# Altium PCB SoilMonitor.PcbDoc
Units mil, origin at the board's own origin, x right, y up, seen from the top; angles counter-clockwise.
Board outline 3736.79 x 2791.9 mil, 4 copper layers (Top Layer, GND, 3V3, Bottom Layer), stack 65.956 mil thick; 38 components, 26 nets, 150 pads, 50 vias.
Unrouted connection lines stored in the file: 2.
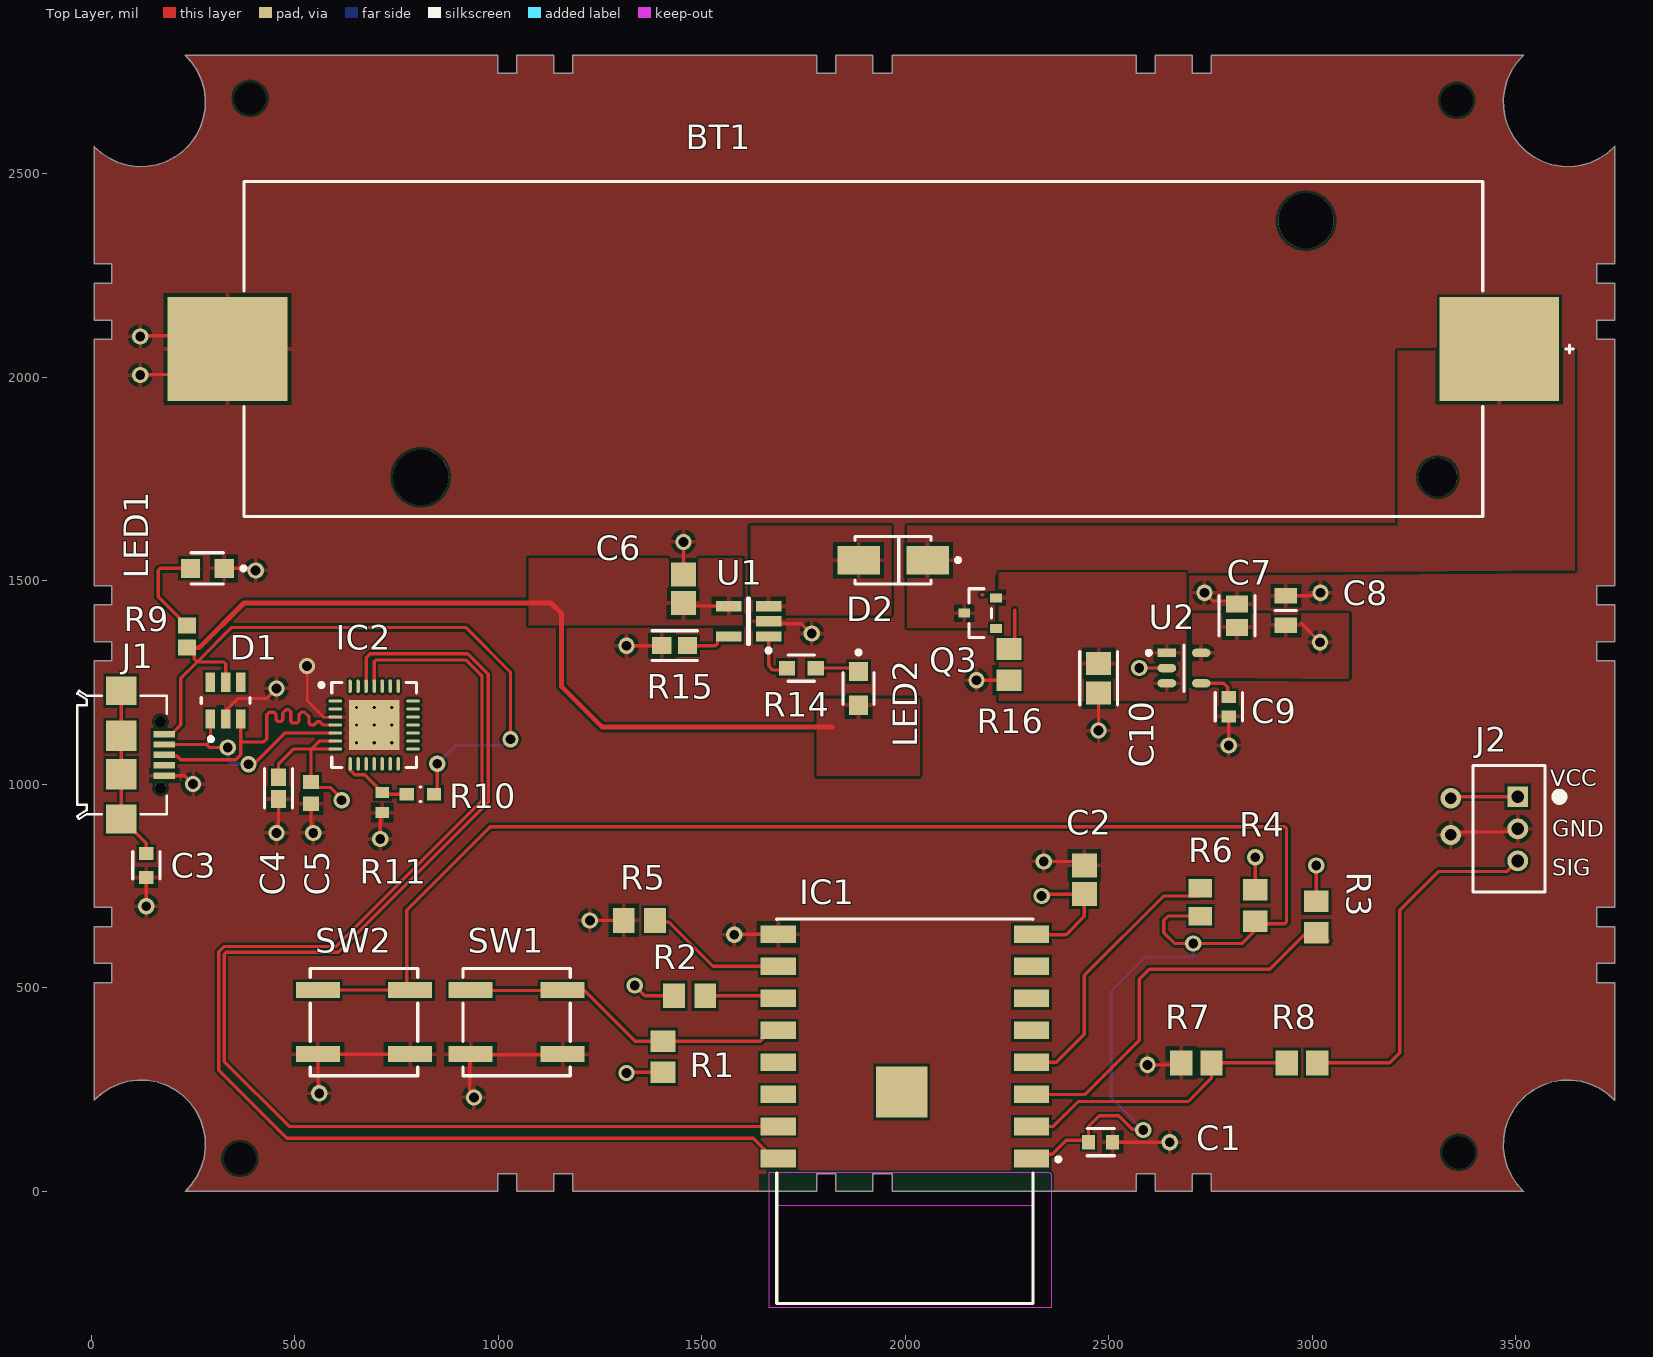
[diagram p0: Top Layer view]
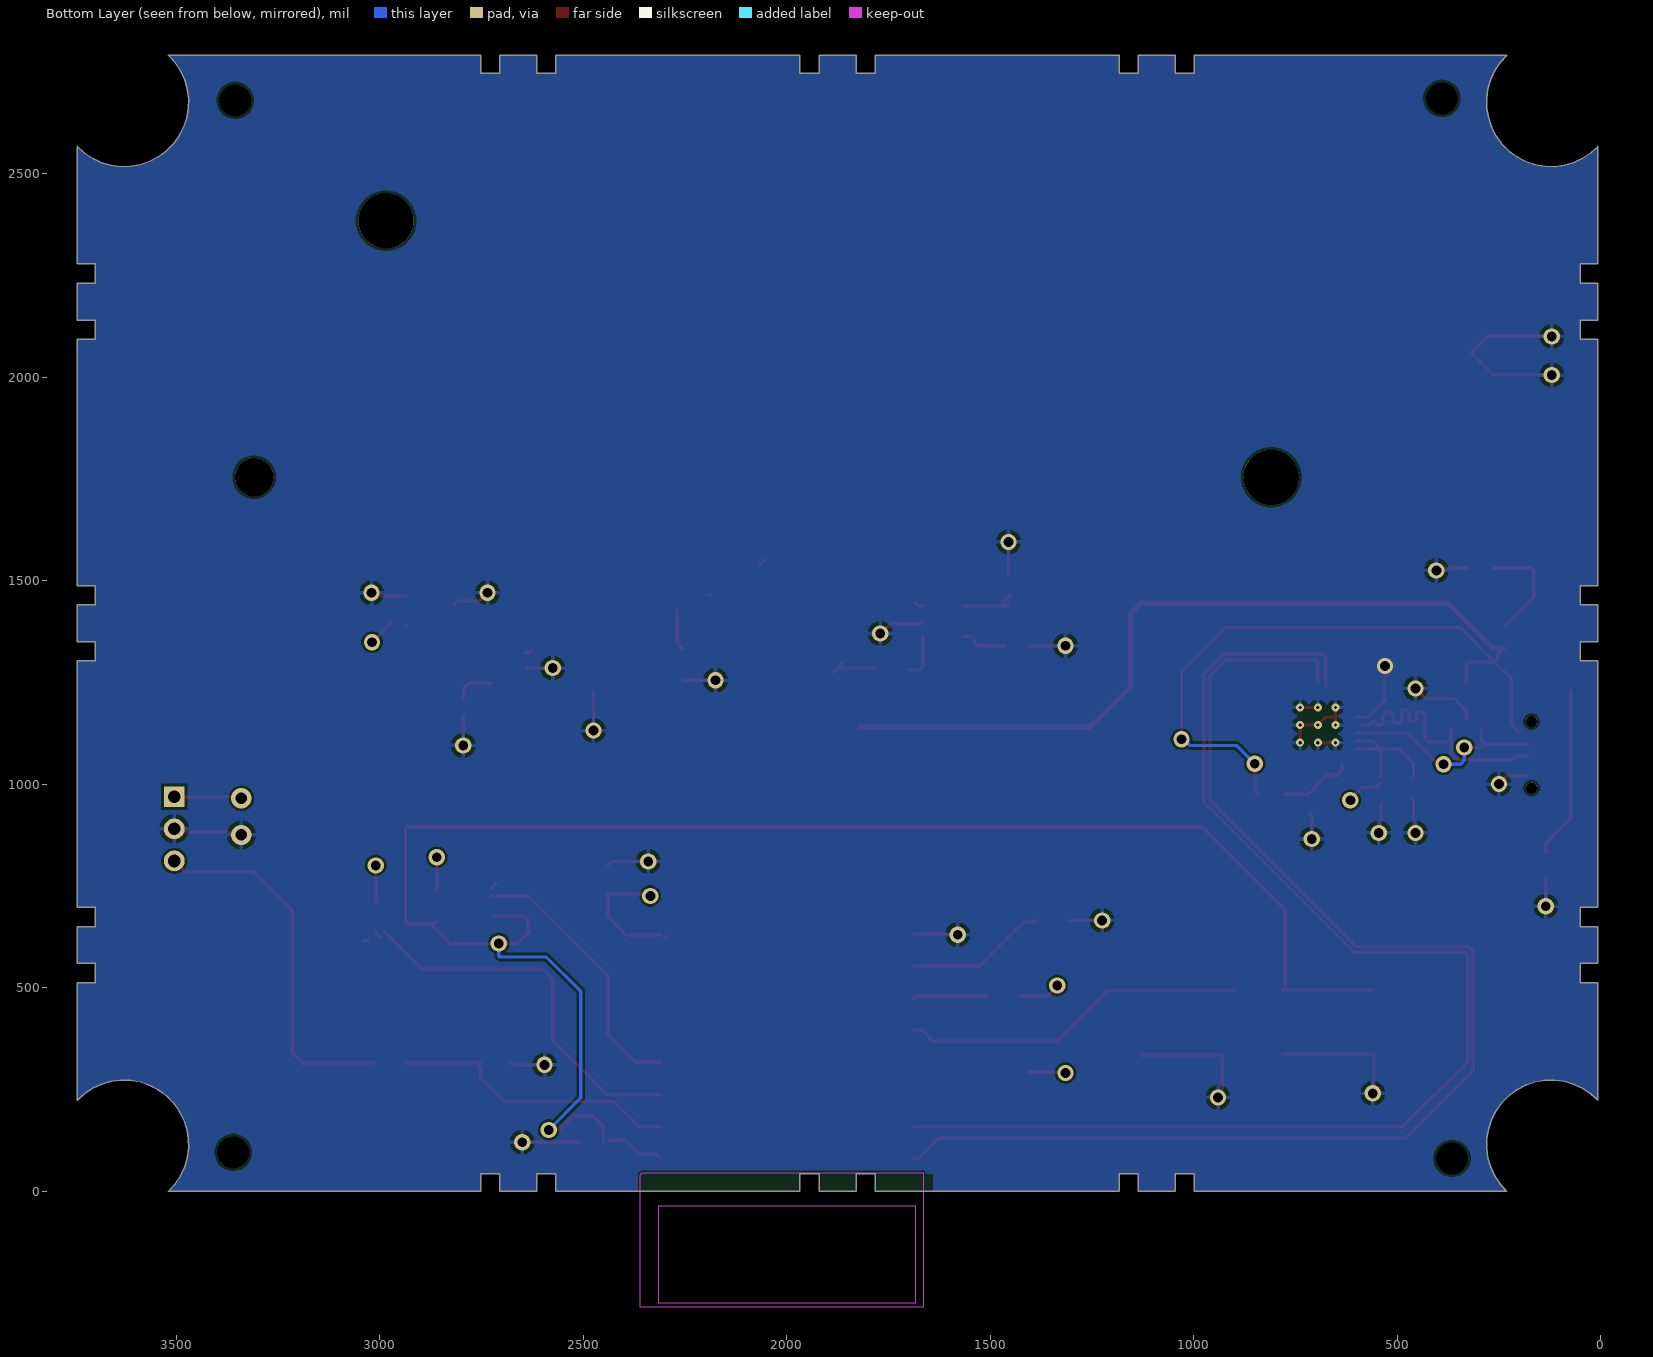
[diagram p1: Bottom Layer view, seen from below]
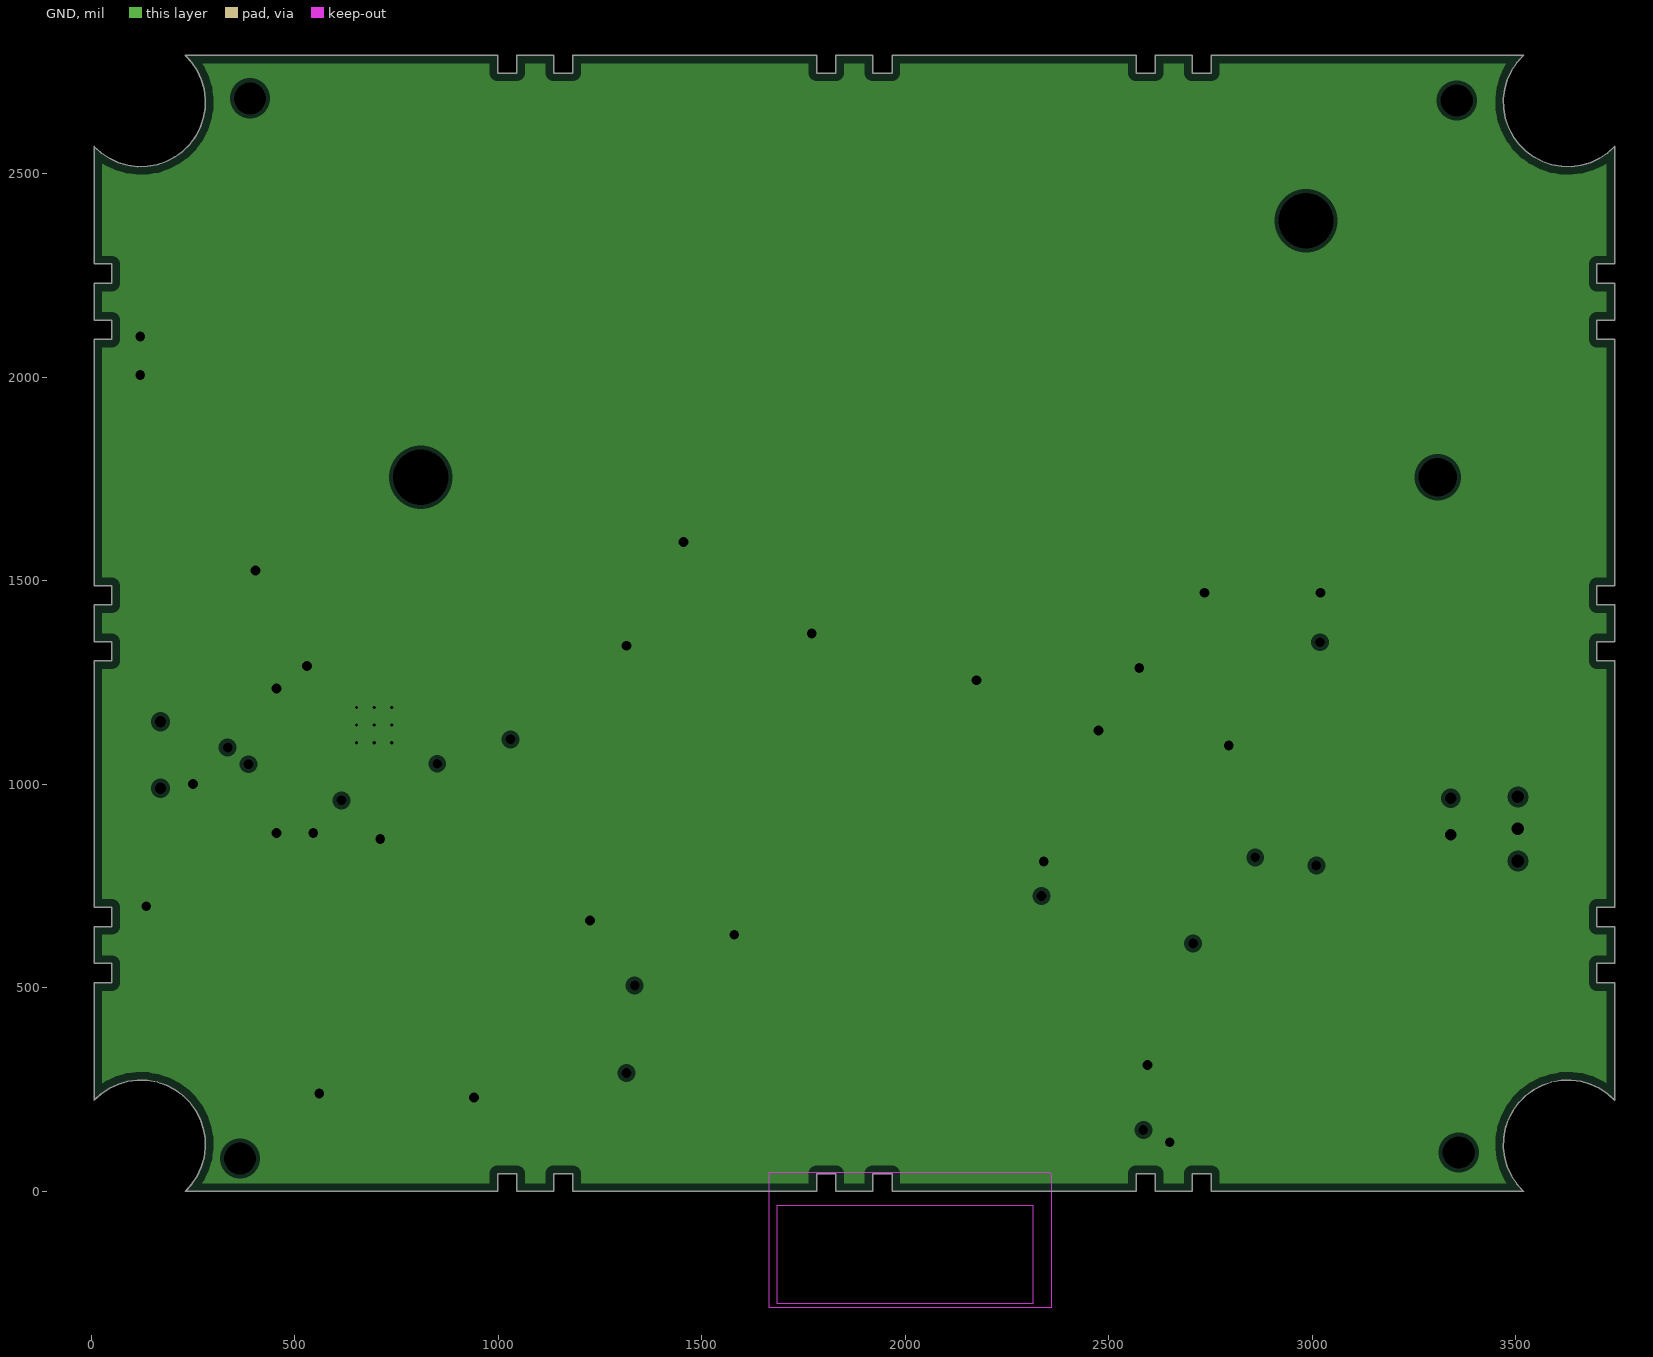
[diagram p2: GND, clearances drawn from the general rule]
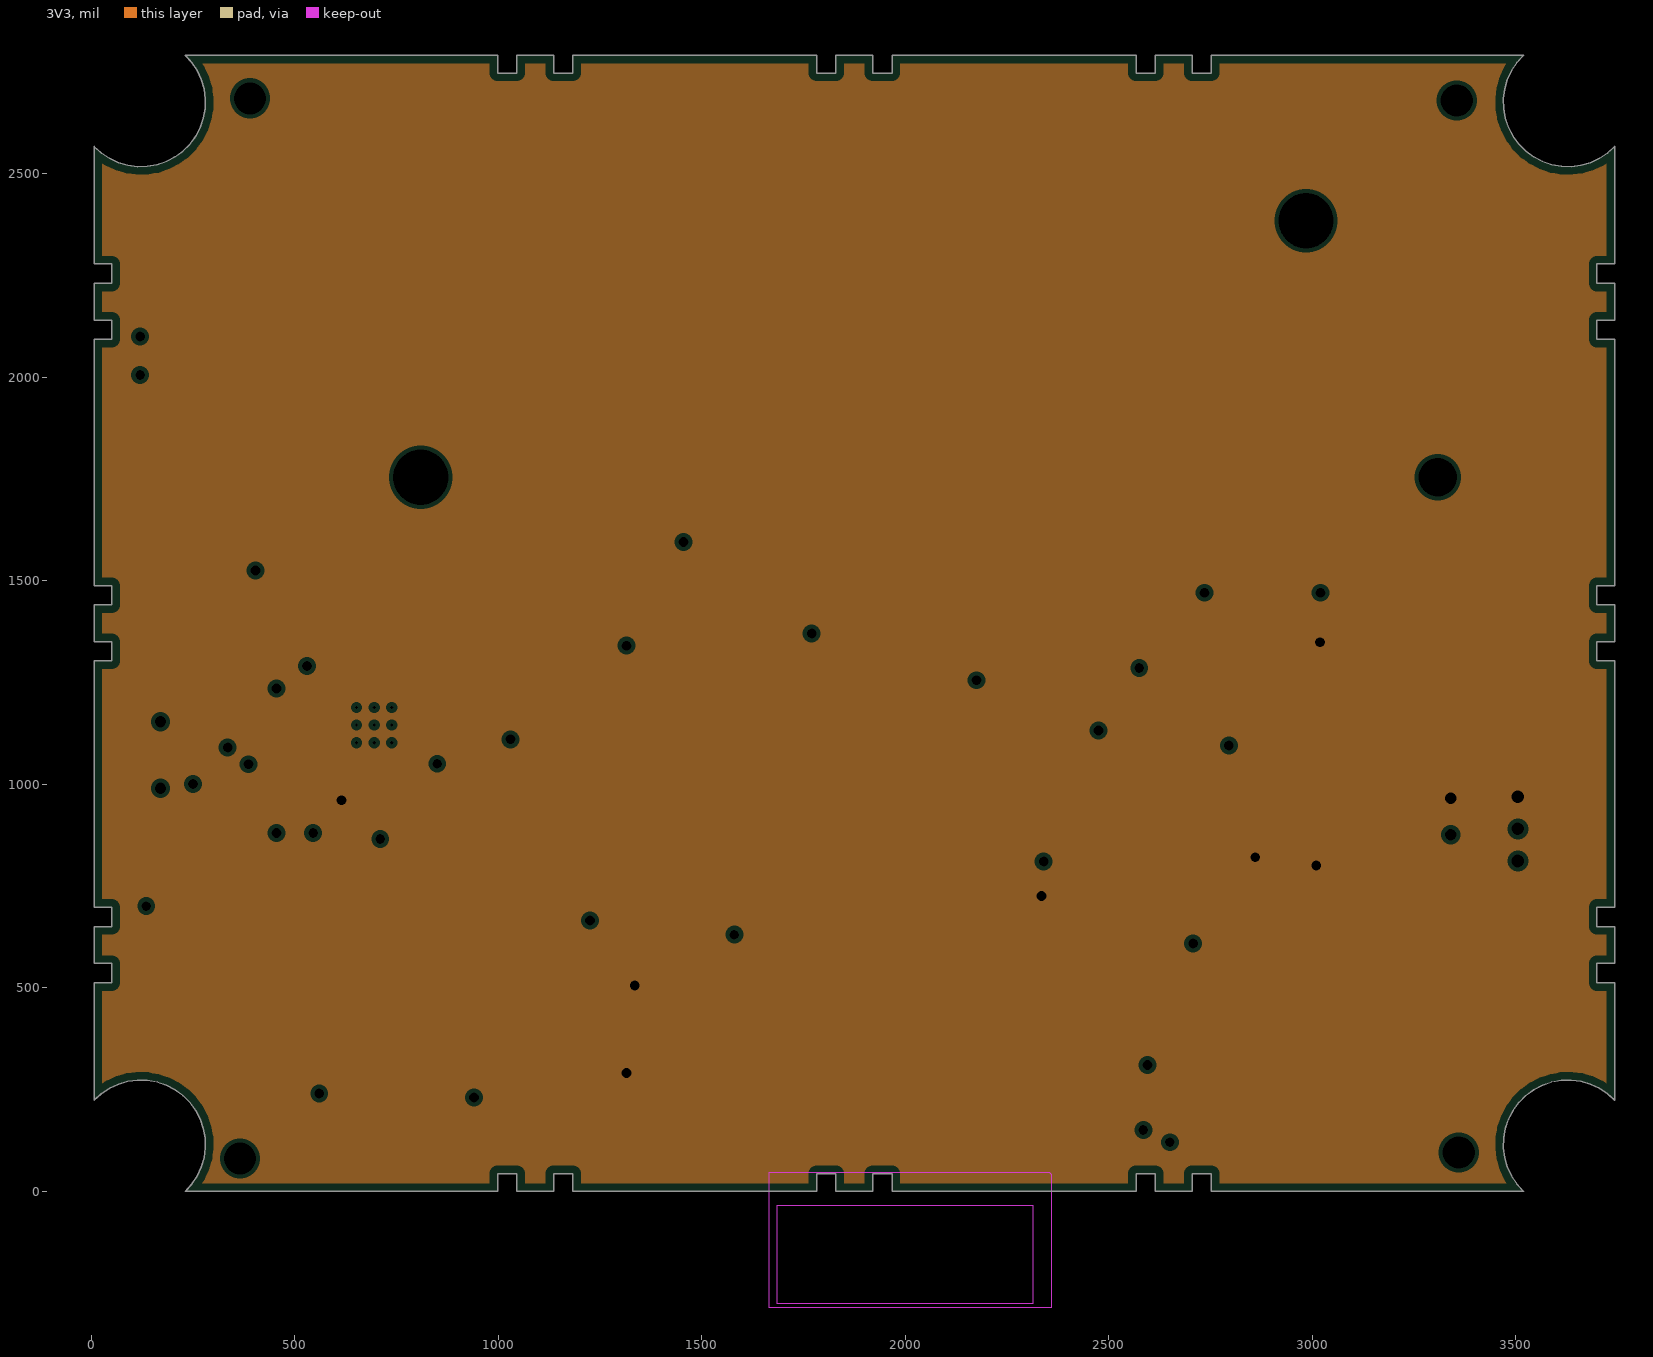
[diagram p3: 3V3, clearances drawn from the general rule]
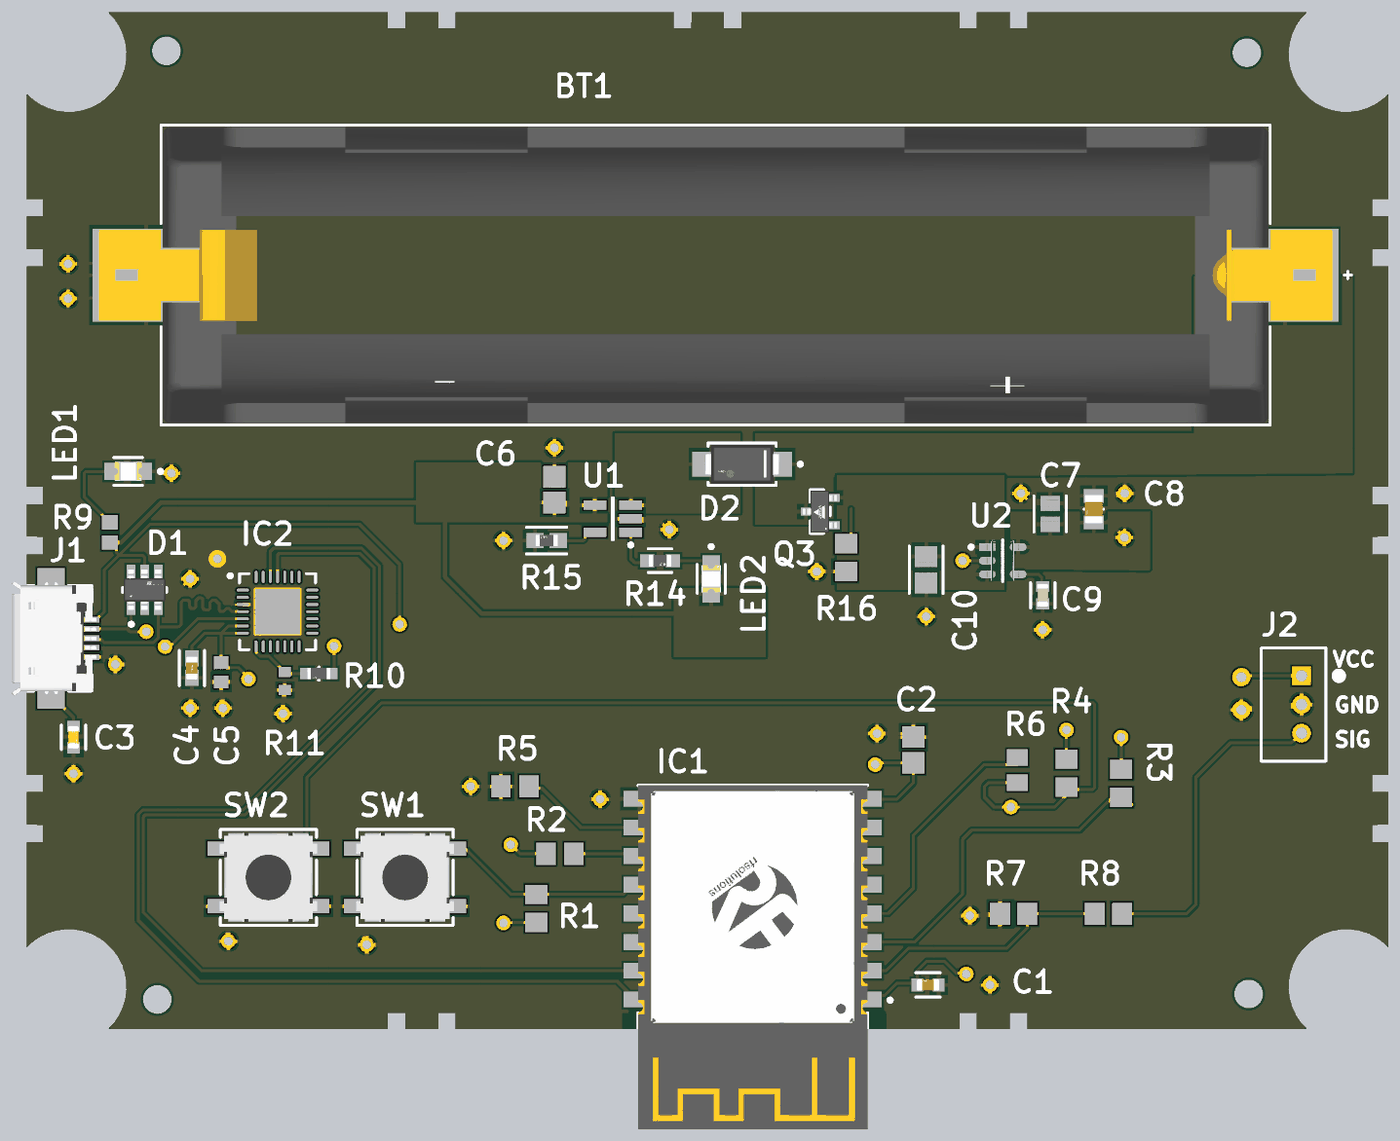
[diagram p4: 3D render of the assembled board from above, using the file's embedded part models]

## Layer stack, top to bottom
Top Solder: solder mask 0.4, Solder Resist, Dk 3.5
Top Layer: signal copper 1.4
Dielectric 2: prepreg 10.2, PP-006, Dk 4.1
GND: plane copper 1.378, net GND
Dielectric 1: core 40, FR-4, Dk 4.8
3V3: plane copper 1.378, net 3V3
Dielectric 3: prepreg 10.2, PP-006, Dk 4.1
Bottom Layer: signal copper 1.4
Bottom Solder: solder mask 0.4, Solder Resist, Dk 3.5

## Board outline
230.65,-0.95 998.04,-0.95 998.04,42.93 1045.28,42.93 1045.28,-0.95 1135.83,-0.95 1135.83,42.93 1183.08,42.93 1183.08,-0.95 1782.48,-0.95 1782.48,42.93 1829.72,42.93 1829.72,-0.95 1920.28,-0.95 1920.28,42.93 1967.52,42.93 1967.52,-0.95 2566.92,-0.95 2566.92,42.93 2614.17,42.93 2614.17,-0.95 2704.72,-0.95 2704.72,42.93 2751.96,42.93 2751.96,-0.95 3519.35,-0.95 3503.08,16.89 3489.71,36.99 3479.55,58.89 3472.83,82.08 3469.71,106.02 3470.27,130.16 3474.48,153.93 3482.26,176.79 3493.42,198.2 3507.7,217.67 3524.77,234.74 3544.24,249.02 3565.65,260.18 3588.51,267.96 3612.28,272.17 3636.42,272.73 3660.36,269.61 3683.55,262.89 3705.45,252.73 3725.55,239.36 3743.39,223.09 3743.39,512.08 3699.51,512.08 3699.51,559.33 3743.39,559.33 3743.39,649.88 3699.51,649.88 3699.51,697.12 3743.39,697.12 3743.39,1302.48 3699.51,1302.48 3699.51,1349.72 3743.39,1349.72 3743.39,1440.28 3699.51,1440.28 3699.51,1487.52 3743.39,1487.52 3743.39,2092.88 3699.51,2092.88 3699.51,2140.12 3743.39,2140.12 3743.39,2230.67 3699.51,2230.67 3699.51,2277.92 3743.39,2277.92 3743.39,2566.91 3725.55,2550.64 3705.45,2537.27 3683.55,2527.11 3660.36,2520.39 3636.42,2517.27 3612.28,2517.83 3588.51,2522.04 3565.65,2529.82 3544.24,2540.98 3524.77,2555.26 3507.7,2572.33 3493.42,2591.8 3482.26,2613.21 3474.48,2636.07 3470.27,2659.84 3469.71,2683.98 3472.83,2707.92 3479.55,2731.11 3489.71,2753.01 3503.08,2773.11 3519.35,2790.95 2751.96,2790.95 2751.96,2747.07 2704.72,2747.07 2704.72,2790.95 2614.17,2790.95 2614.17,2747.07 2566.92,2747.07 2566.92,2790.95 1967.52,2790.95 1967.52,2747.07 1920.27,2747.07 1920.27,2790.95 1829.72,2790.95 1829.72,2747.07 1782.48,2747.07 1782.48,2790.95 1183.07,2790.95 1183.07,2747.07 1135.83,2747.07 1135.83,2790.95 1045.28,2790.95 1045.28,2747.07 998.04,2747.07 998.04,2790.95 230.64,2790.95 246.91,2773.11 260.29,2753.01 270.45,2731.11 277.17,2707.92 280.29,2683.98 279.73,2659.84 275.52,2636.07 267.74,2613.21 256.58,2591.8 242.3,2572.33 225.23,2555.26 205.76,2540.98 184.35,2529.82 161.49,2522.04 137.72,2517.83 113.58,2517.27 89.64,2520.39 66.45,2527.11 44.55,2537.27 24.45,2550.64 6.61,2566.91 6.61,2277.92 50.49,2277.92 50.49,2230.67 6.61,2230.67 6.61,2140.12 50.49,2140.12 50.49,2092.88 6.61,2092.88 6.61,1487.52 50.49,1487.52 50.49,1440.28 6.61,1440.28 6.61,1349.72 50.49,1349.72 50.49,1302.48 6.61,1302.48 6.61,697.12 50.49,697.12 50.49,649.88 6.61,649.88 6.61,559.32 50.49,559.32 50.49,512.08 6.61,512.08 6.61,223.09 24.45,239.36 44.55,252.73 66.45,262.89 89.64,269.61 113.58,272.73 137.72,272.17 161.49,267.96 184.35,260.18 205.76,249.02 225.23,234.74 242.3,217.67 256.58,198.2 267.74,176.79 275.52,153.93 279.73,130.16 280.29,106.02 277.17,82.08 270.45,58.89 260.29,36.99 246.92,16.89

## Design rules (kind name [scope] priority, off if disabled: settings)
Clearance [All] p1: gap=6 ignorepadtopadclearanceinfootprint=TRUE except(0: Arc-Hole Track-Hole SMDPad-Hole THPad-Hole Via-Hole Fill-Hole Poly-Hole Region-Hole Text-Hole)
HoleSize [All] p1: absolutevalues=TRUE maxlimit=150 minlimit=1 maxpercent=80.000 minpercent=20.000
MinimumSolderMaskSliver [All] p1: minsoldermaskwidth=3
PlaneClearance [All] p1: clearance=10
PlaneConnect GND_Internal_Pad [InComponent('IC2')] p1: planeconnectstyle=Direct reliefexpansion=20 reliefentries=4 reliefconductorwidth=10 reliefairgap=10
PlaneConnect [All] p2: planeconnectstyle=Relief reliefexpansion=20 reliefentries=4 reliefconductorwidth=10 reliefairgap=10
PolygonConnect [All] p1: connectstyle=Relief reliefconductorwidth=10 reliefentries=4 polygonreliefangle="90 Angle" airgapwidth=10
RoutingVias [All] p1: holewidth=16 width=31.5 viastyle="Through Hole" minholewidth=12 minwidth=24 maxholewidth=24 maxwidth=40
SilkToSolderMaskClearance [IsPad] p1: minsilkscreentomaskgap=6 clearancetoexposedcopper=TRUE
SolderMaskExpansion [All] p1: expansion=4 istentingtop=FALSE
Width [All] p1: maxlimit=12 minlimit=6 preferedwidth=8
25 further rules are at their usual default settings.

## Classes and differential pairs
component class USB_to_UART: C4 C5 IC2 R10 R11
component class USB_Input: C3 D1 J1 LED1 R9
component class ESP_Controller: C1 C2 IC1 J2 R1 R2 R3 R4 R5 R6 R7 R8 SW1 SW2
component class Battery_Charging: BT1 C6 C7 C8 C9 C10 D2 LED2 Q3 R14 R15 R16 U1 U2

## Components (designator, comment, footprint, x,y, rotation, side; value= is the part's Value field where it differs from the comment)
BT1 "1042P" FP-1042P-MFG 1897.06,2069.08 r0 top
C1 "0.1µF" FP-CC0603-DA-MFG 2480,120 r0 top
C2 "2.2µF" CAPC2013X145X50ML20T25 2440,765 r270 top
C3 "1nF" FP-CC0603-DA-MFG 135,800 r90 top value="1.0 nF"
C4 "10µF" FP-CC0603-0_15-0_95-IPC_B 460,990 r270 top
C5 "0.1µF" CAPC1608X87X35NL15T15 540,978.43 r90 top
C6 "2.2uF" CAPC2013X145X50ML20T25 1455,1480 r270 top
C7 "10uF" FP-CL21-IPC_C 2815,1413.57 r90 top
C8 "0.1uF" FP-CC0805-EA-MFG 2935,1426.42 r90 top
C9 "470pF" FP-C0603C-CF-MFG 2795,1190 r270 top value="470 pF"
C10 "10uF" FP-CL21-IPC_A 2475,1260 r270 top
D1 "USBLC6-4SC6" FP-SOT23-6L-MFG 330,1205 r90 top value=3pF
D2 "SS14" FP-403AE-MFG 1970,1550 r0 top
IC1 "ESP-12S" FP-ESP-12S-MFG 1998.98,196.14 r180 top
IC2 "CP2102-GM" SLAB-QFN-28-3125x3125TP_N 695,1145 r0 top
J1 "629105136821" 629105136821 73.54,1071.69 r270 top
J2 "B3B-PH-K-S(LF)(SN)" JST-B3B-PH-K-S-3_V 3483.35,890 r270 top
LED1 "LS R976-NR-1" FP-LS_R976-MFG 285,1530 r180 top
LED2 "LS R976-NR-1" FP-LS_R976-MFG 1885,1235 r270 top
Q3 "SI2301BDS-T1-GE3" FP-S-03946-MFG 2184,1420 r180 top
R1 "12K" RESC2013X70X40ML20T20 1405,330 r270 top
R2 "12K" RESC2013X70X40ML20T20 1470,480 r180 top
R3 "12K" RESC2013X70X40ML20T20 3010,673.39 r90 top
R4 "12K" RESC2013X70X40ML20T20 2860,701.61 r90 top
R5 "12K" RESC2013X70X40ML20T20 1346.61,665 r0 top
R6 "0R" RESC2013X70X40NL20T20 2725,710 r90 top
R7 "4.7K" RESC2013X60X40ML20T25 2715,315 r0 top
R8 "2K" RESC2013X60X40ML20T25 2975,315 r0 top
R9 "680R" RESC1608X55X30ML20T20 235,1362.56 r270 top
R10 "22.1K" FP-RC0603-0_55-MFG 808.46,975 r180 top
R11 "47.5K" RESC1608X55X30LL15T15 715,954.61 r90 top
R14 "330R" FP-CPF0603-MFG 1744.57,1285 r180 top value=330Ω
R15 "2K" FP-RMCF0603-IPC_A 1433.46,1340 r180 top
R16 "100KR" RESC2013X70X40ML20T20 2255,1293.39 r270 top
SW1 "430773051825" 430773051825 1045,415 r180 top
SW2 "430773051825" 430773051825 670,415 r180 top
U1 "LTC4054ES5-4.2#TRMPBF" LT-S5-5-TSOT-23_M 1615,1400 r180 top
U2 "MIC5219-3.3YM5-TR" FP-SOT23-5LD-PL-1-IPC_C 2685,1285 r0 top

## Footprints (in the part's own frame and the unit in brackets; to place one, negate y for a bottom-side part, rotate by r counter-clockwise, add the part's x,y. Pads: shape width x height; smd on the part's side, far side on the other; paste and mask are expansions set on the pad)
430773051825 [mm] "SMD Tact Switch, body 6x6mm"
  rect 2.75x1 smd: A1(-2.875,2) A2(2.875,2) B1(-2.875,-2) B2(2.875,-2)
  silkscreen extent -3.35,-3.35 3.35,3.35, body extent -3.4,-3.1 3.4,3.1, height 5.1
629105136821 [mm] "Micro USB 2.0 SMT Type B Horizontal 5 Contacts"
  rect 0.4x1.35 smd: 1(-1.3,2.675) 2(-0.65,2.675) 3(0,2.675) 4(0.65,2.675) 5(1.3,2.675)
  round 0.7 hole 0.7 unplated: MH1(-2.075,2.45) MH2(2.075,2.45)
  rect 1.8x1.9 smd: Shell(-4,0) Shell(4,0)
  rect 1.9x1.9 smd: Shell(-1.2,0) Shell(1.2,0)
  silkscreen extent -4,-2.75 4,2.85, body extent -4,-2.73 4,3.17, height 2.69
CAPC1608X87X35NL15T15 [mm] "Chip Capacitor, 2-Leads, Body 1.60x0.80mm, IPC Medium Density"
  rect 0.9x1 smd: 1(-0.675,0) 2(0.675,0)
  body extent -0.87,-0.48 0.87,0.47, height 0.87
CAPC2013X145X50ML20T25 [mm] "Chip Capacitor, 2-Leads, Body 2.00x1.25mm, IPC Low Density"
  rect 1.5x1.55 smd: 1(-0.9,0) 2(0.9,0)
  body extent -1.1,-0.72 1.1,0.72, height 1.45
FP-403AE-MFG [mm]
  rect 2.65x1.75 smd paste+0 mask+0: 1(-2.15,0) 2(2.15,0)
  silkscreen extent -2.37,-1.48 4.18,1.48, body extent -3.57,-1.58 3.57,1.58, height 0.25
FP-1042P-MFG [mil]
  rect 294x255 smd paste+0 mask+0: 1(-1562.5,0) 2(1562.5,0)
  round 135.83 hole 135.83 unplated paste-39370.1 mask+0: ""(-1087.5,-315) ""(1087.5,315)
  round 94 hole 94 unplated paste-39370.1 mask+0: ""(1411.5,-315)
  silkscreen extent -1522,-412 1745,412, body extent -1693,-407 1693,406, height 595
FP-C0603C-CF-MFG [mm]
  rect 0.75x0.9 smd paste+0 mask+0: 1(-0.6,0) 2(0.6,0)
  silkscreen extent -0.87,-0.85 0.88,0.85, body extent -1.2,-0.6 1.2,0.6, height 0.25
FP-CC0603-0_15-0_95-IPC_B [mil]
  rect 43.55x37.73 smd paste+0 mask+0: 1(-26.62,0) 2(26.62,0)
  silkscreen extent -48,-35 48,35, body extent -58,-29 58,29, height 10
FP-CC0603-DA-MFG [mm]
  rect 0.8x0.9 smd paste+0 mask+0: 1(-0.75,0) 2(0.75,0)
  silkscreen extent -0.85,-0.85 0.85,0.85, body extent -1.43,-0.82 1.43,0.82, height 0.25
FP-CC0805-EA-MFG [mm]
  rect 0.95x1.4 smd paste+0 mask+0: 1(-0.925,0) 2(0.925,0)
  silkscreen extent 0,-0.67 0,0.67, body extent -1.73,-1.17 1.73,1.17, height 0.25
FP-CL21-IPC_A [mil]
  rect 57.27x61.27 smd paste+0 mask+0: 1(-36.45,0) 2(36.45,0)
  silkscreen extent -65,-46 65,46, body extent -85,-50 85,50, height 10
FP-CL21-IPC_C [mil]
  rect 41.52x53.39 smd paste+0 mask+0: 1(-28.57,0) 2(28.57,0)
  silkscreen extent -49,-44 49,44, body extent -53,-32 53,32, height 10
FP-CPF0603-MFG [mm]
  rect 1x0.9 smd paste+0 mask+0: 1(-0.9,0) 2(0.9,0)
  silkscreen extent -0.82,-0.82 0.82,0.82, body extent -1.5,-0.55 1.5,0.55, height 0.25
FP-ESP-12S-MFG [mm]
  rect 2.2x1.1 smd paste+0 mask+0: 1(-7.9,2.95) 2(-7.9,0.95) 3(-7.9,-1.05) 4(-7.9,-3.05) 5(-7.9,-5.05) 6(-7.9,-7.05) 7(-7.9,-9.05) 8(-7.9,-11.05) 9(7.9,-11.05) 10(7.9,-9.05) 11(7.9,-7.05) 12(7.9,-5.05) 13(7.9,-3.05) 14(7.9,-1.05) 15(7.9,0.95) 16(7.9,2.95)
  rect 3.2x3.2 smd paste+0 mask+0: 17(0.2,-1.2)
  Keep-Out Layer region: -8,5.9 8,5.9 8,12 -8,12
  Keep-Out Layer region: -8,5.9 8,5.9 8,12 -8,12
  silkscreen extent -9.7,-12 8,12, body extent -9.1,-12.1 9.1,12.1, height 0.25
FP-LS_R976-MFG [mm]
  rect 1.2x1.2 smd paste+0 mask+0: 1(-1.05,0) 2(1.05,0)
  silkscreen extent -2.38,-0.97 1,0.97, body extent -1.75,-0.8 1.75,0.8, height 0.25
FP-RC0603-0_55-MFG [mm]
  rect 0.9x0.8 smd paste+0 mask+0: 1(-0.85,0) 2(0.85,0)
  silkscreen extent -0.03,-0.45 0.03,0.45, body extent -1.4,-0.55 1.4,0.55, height 0.25
FP-RMCF0603-IPC_A [mil]
  rect 47.48x41.66 smd paste+0 mask+0: 1(-31.54,0) 2(31.54,0)
  silkscreen extent -55,-37 55,37, body extent -75,-41 75,41, height 10
FP-S-03946-MFG [mil]
  rect 29x22 smd paste+0 mask+0: 1(-39,37.5) 2(-39,-37.5) 3(39,0)
  silkscreen extent -28,-60 28,60, body extent -57,-64 57,64, height 10
FP-SOT23-5LD-PL-1-IPC_C [mm]
  rect 1.156x0.53 smd paste+0 mask+0: 1(-1.075,0.95)
  rrect100% 1.156x0.53 smd paste+0 mask+0: 2(-1.075,0) 3(-1.075,-0.95) 4(1.075,-0.95) 5(1.075,0.95)
  silkscreen extent -2.33,-1.45 0,1.45, body extent -1.75,-1.55 1.75,1.55, height 0.25
FP-SOT23-6L-MFG [mm]
  rect 1.2x0.6 smd paste+0 mask+0: 1(-1.15,0.95) 2(-1.15,0) 3(-1.15,-0.95) 4(1.15,-0.95) 5(1.15,0) 6(1.15,0.95)
  silkscreen extent -2.52,-1.53 0.18,1.53, body extent -1.85,-1.63 1.85,1.63, height 0.25
JST-B3B-PH-K-S-3_V [mm] "Connector, 3-Leads, Body 7.9x4.5mm, Pitch 2mm"
  rect 1.3x1.3 hole 0.8: 1(-2,0.55)
  round 1.3 hole 0.8: 2(0,0.55) 3(2,0.55)
  silkscreen extent -3.95,-2.25 3.95,3.4, body extent -3.95,-2.25 3.95,2.25, height 6
LT-S5-5-TSOT-23_M [mm] "SOT23, 5-Leads, Body 2.90x1.63mm, Pitch 0.95mm, IPC Low Density"
  rect 1.6x0.65 smd: 1(-1.25,0.95) 2(-1.25,0) 3(-1.25,-0.95) 4(1.25,-0.95) 5(1.25,0.95)
  silkscreen extent -1.38,-1.45 0.05,1.95, body extent -0.87,-1.45 0.87,1.45, height 1
RESC1608X55X30LL15T15 [mm] "Chip Resistor, 2-Leads, Body 1.60x0.80mm, IPC High Density"
  rect 0.7x0.85 smd: 1(-0.625,0) 2(0.625,0)
  body extent -0.87,-0.48 0.87,0.48, height 0.55
RESC1608X55X30ML20T20 [mm] "Chip Resistor, 2-Leads, Body 1.60x0.80mm, IPC Low Density"
  rect 1x1.1 smd: 1(-0.7,0) 2(0.7,0)
  body extent -0.9,-0.5 0.9,0.5, height 0.55
RESC2013X60X40ML20T25 [mm] "Chip Resistor, 2-Leads, Body 2.00x1.25mm, IPC Low Density"
  rect 1.4x1.55 smd: 1(-0.95,0) 2(0.95,0)
  body extent -1.1,-0.72 1.1,0.72, height 0.6
RESC2013X70X40ML20T20 [mm] "Chip Resistor, 2-Leads, Body 2.00x1.25mm, IPC Low Density"
  rect 1.35x1.55 smd: 1(-0.975,0) 2(0.975,0)
  body extent -1.1,-0.72 1.1,0.72, height 0.7
RESC2013X70X40NL20T20 [mm] "Chip Resistor, 2-Leads, Body 2.00x1.25mm, IPC Medium Density"
  rect 1.15x1.45 smd: 1(-0.875,0) 2(0.875,0)
  body extent -1.1,-0.72 1.1,0.72, height 0.7
SLAB-QFN-28-3125x3125TP_N [mm] "QFN, 28-Leads, Body 5x5mm, Pitch 0.5mm, Thermal Pad 3.13x3.13mm, IPC Medium Density"
  oval 0.85x0.2 smd: 1(-2.425,1.5) 2(-2.425,1) 3(-2.425,0.5) 4(-2.425,0) 5(-2.425,-0.5) 6(-2.425,-1) 7(-2.425,-1.5) 15(2.425,-1.5) 16(2.425,-1) 17(2.425,-0.5) 18(2.425,0) 19(2.425,0.5) 20(2.425,1) 21(2.425,1.5)
  oval 0.2x0.85 smd: 8(-1.5,-2.425) 9(-1,-2.425) 10(-0.5,-2.425) 11(0,-2.425) 12(0.5,-2.425) 13(1,-2.425) 14(1.5,-2.425) 22(1.5,2.425) 23(1,2.425) 24(0.5,2.425) 25(0,2.425) 26(-0.5,2.425) 27(-1,2.425) 28(-1.5,2.425)
  rect 3.13x3.13 smd: 29(0,0)
  silkscreen extent -3.42,-2.65 2.65,2.65, body extent -2.5,-2.5 2.5,2.5, height 1

## Part data
BT1: library part CMP-19636-000019-1, "BATTERY HOLDER 18650 SMD TAB", Max Operating Temperature=145°C, Min Operating Temperature=-50°C, Package Quantity=200, Lead Free="Lead Free", Mount="Surface Mount", Number of Cells=1, Packaging=Tray, Termination=SMD/SMT
C1: library part CMP-03422-001463-1, "Capacitor Ceramic 0.1uF 6.3V X7R 10% 0603 Paper T/R", RoHS Compliant=Yes
C2 C6: library part CMP-1036-04819-2, Manufacturer=Kemet, Part Number=C0805C225K9PACTU
C3: library part CMP-2100-03599-2, "CAP CER 1000PF 50V X7R 0603", Capacitance="1.0 nF", Manufacturer=YAGEO, Manufacturer Part Number=CC0603KRX7R9BB102, Package=CC0603-DA, Temperature="-55°C to +125°C", Temperature Characteristic=X7R, Temperature Coefficient=15%, Temperature Range High=+125°C, Temperature Range Low=-55°C, Tolerance=0.1, Voltage="50 V", Automotive=No, Category=Cap, ComponentLink2Description=Datasheet, ComponentLink2URL=http://www.yageo.com/documents/recent/UPY-GPHC_X7R_6.3V-to-50V_18.pdf, Device Class L1="Passive Components", Device Class L2=Capacitors, Device Class L3="Ceramic Capacitors", Digikey Description="CAP CER 1000PF 50V X7R 0603", Footprint Url=http://www.yageo.com/exep/pages/download/literatures/UPY-C_GEN_24.pdf, Height=0.9mm, Lead Free=Yes, Material=Ceramic, Mouser Description="Multilayer Ceramic Capacitors MLCC - SMD/SMT 1.0nF 50V X7R 10%", Octopart=https://octopart.com/cc0603krx7r9bb102-yageo-192933, RoHS=TRUE, Voltage Rating="50 V"
C4: library part CMP-03422-001506-1, "CAP CER 10UF 6.3V X5R 0603", Capacitance=10uF, Case Code (Imperial)=0603, Case Code (Metric)=1608, Dielectric=X5R, Max Operating Temperature=85°C, Min Operating Temperature=-55°C, Resistor Type=Ceramic, Tolerance=20%, Voltage=4V, Voltage Rating=6.3V, Case/Package=0603, Construction=Flat, Depth=0.8mm, Halogen Free="Halogen Free", Height=0.8mm, Lead Free="Lead Free", Length=1.6mm, Mount="Surface Mount", Packaging="Tape and Reel", Radiation Hardening=No, RoHS Compliant=Yes, Series=CC, Termination=SMD/SMT, Thickness=0.035inch, Voltage Rating (DC)=6.3V, Weight=7.1E-05oz, Width=0.031inch
C5: library part CMP-1035-02576-2, Manufacturer=Kemet, Part Number=C0603C104K9RACTU
C7: library part CMP-13271-000175-1, "CL21 Series 0805 10uF 6.3V ±10% Tolerance X6S Multilayer Ceramic Chip Capacitor", Case Code (Imperial)=0805, Case Code (Metric)=2012, Dielectric=X6S, Max Operating Temperature=105°C, Min Operating Temperature=-55°C, Package Quantity=1, Tolerance=10%, Voltage Rating=6.3V, Capacitance=10uF, Case/Package=0805, Depth=1.25mm, Height=1.25mm, Lead Free="Lead Free", Length=2mm, Mount="Surface Mount", Packaging="Tape and Reel", Radiation Hardening=No, Thickness=0.055inch, Voltage Rating (DC)=6.3V, Width=0.049inch
C8: library part CMP-03422-000810-2, "CAP CER X7R 0805", RoHS Compliant=Yes
C9: library part CMP-03020-003327-1, "CAP CER 470PF 10V X7R 0603", Capacitance="470 pF", Manufacturer=KEMET, Manufacturer Part Number=C0603C471K8RACTU, Package=C0603C-CF, Temperature="-55°C to +125°C", Temperature Characteristic=X7R, Temperature Coefficient=30ppm/°C, Temperature Range High=+125°C, Temperature Range Low=-55°C, Tolerance=0.1, Voltage Rating="10 V", Automotive=Yes, Automotive Grade="Grade 1", Category=Cap, ComponentLink2Description=Datasheet, ComponentLink2URL=https://api.kemet.com/component-edge/download/datasheet/C0603C100J5GACAUTO.pdf, Device Class L1="Passive Components", Device Class L2=Capacitors, Device Class L3="Ceramic Capacitors", Digikey Description="CAP CER 470PF 10V X7R 0603", Height=0.87mm, Lead Free=Yes, Material=Ceramic, Mouser Description="Capacitor, Ceramic, 470Pf, 10Vdc, 10-% Tol, 10+% Tol, X7r-Tc Code, -15, 15%-Tc Rohs Compliant: Yes", Octopart=https://octopart.com/c0603c471k8ractu-kemet-9138956, RoHS=TRUE
C10: library part CMP-13271-001826-1, "CL21 Series 0805 10uF 6.3V ±10% Tolerance X5R Multilayer Ceramic Chip Capacitor", Case Code (Imperial)=0805, Case Code (Metric)=2012, Dielectric=X5R, Max Operating Temperature=85°C, Min Operating Temperature=-55°C, Package Quantity=1, Tolerance=10%, Voltage Rating=6.3V, Capacitance=10uF, Case/Package=0805, Contact Plating=Tin, Depth=1.25mm, Height=1.25mm, Lead Free="Lead Free", Length=2mm, Mount="Surface Mount", Packaging="Tape and Reel", Radiation Hardening=No, Thickness=0.053inch, Voltage Rating (DC)=6.3V, Width=0.049inch
D1: library part CMP-2000-07370-2, "TVS DIODE 5.25V 17V SOT23-6", Breakdown Voltage=6V, Capacitance=3pF, Clamping Voltage=17V, Manufacturer=STMicroelectronics, Max Junction Temp=+125°C, Package=SOT23-6L, Peak Pulse Power=130W, Temperature="-40°C to +125°C", Temperature Range Low=-40°C, Automotive=No, Category=Diode, ComponentLink2Description=Datasheet, ComponentLink2URL=https://upverter.com/datasheet/23dc4ffb028d868909e80577610284b194f13213.pdf, Device Class L1="Circuit Protection", Device Class L2="ESD and Circuit Protection ICs", Device Class L3=unset, Digikey Description="TVS DIODE 5.25V 17V SOT23-6", Direction=Unidirectional, Height=1.45mm, Interface=USB,Ethernet,Other, Lead Free=Yes, Manufacturer Part Number=USBLC6-4SC6, Mouser Description="USBLC6 Series 4 Line 6 V Uni / Bi-Directional ESD Protection - SOT-23-6", Number Of Channels=4, Octopart=https://octopart.com/usblc6-4sc6-stmicroelectronics-347147, RoHS=TRUE, Standoff Height=0mm, Temperature Range High=+125°C
D2: library part CMP-2000-04943-2, "DIODE SCHOTTKY 40V 1A SMA", Forward Current=1A, Manufacturer="ON Semiconductor", Max Junction Temp=+125°C, Max Repetitive Reverse Voltage=40V, Max Surge Forward Current=40A, Package=403AE, Peak Reverse Current=0.2mA, Temperature="-65°C to +125°C", Temperature Range Low=-65°C, Automotive=No, Category=Diode, ComponentLink2Description=Datasheet, ComponentLink2URL=https://www.onsemi.com/pub/Collateral/SS19-D.PDF, Device Class L1="Discrete Semiconductors", Device Class L2=Diodes, Device Class L3="Schottky Diodes", Digikey Description="DIODE SCHOTTKY 40V 1A SMA", Height=2.5mm, Lead Free=Yes, Manufacturer Part Number=SS14, Mouser Description="Schottky Diodes & Rectifiers SMA 40V 1.0A", Octopart=https://octopart.com/ss14-on+semiconductor-29205033, RoHS=TRUE, Standoff Height=0.05mm, Temperature Range High=+125°C
IC1: library part CMP-204316-000002-1, "RX TXRX MOD WIFI PCB TRACE SMD", Frequency=2.484GHz, Data Rate=54Mbps, Interface=I2C, Sensitivity=-90dBm, Series=-
IC2: library part CMP-0511-00012-1, "Single-Chip USB to UART Bridge, 1024 Bytes EEPROM, -40 to 85 degC, 28-pin QFN, Tube", Manufacturer="Silicon Labs", Code_IPC=J-STD-020C, Code_JEDEC=MO-220, ComponentLink1Description="Manufacturer URL", ComponentLink1URL=http://www.silabs.com/, ComponentLink2Description=Datasheet, ComponentLink2URL=http://www.silabs.com/Support%20Documents/TechnicalDocs/CP2102-9.pdf, ComponentLink3Description="Package Specification", ComponentLink3URL=http://www.silabs.com/Support%20Documents/TechnicalDocs/C8051T61x.pdf, DatasheetVersion="Rev. 1.5", EEPROM="1024 Bytes", Internal Oscillator=TRUE, Mounting Technology="Surface Mount", PackageDescription="28-Pin Quad-Flat No-Leads Package, Body 5 x 5 mm, Pitch 0.5 mm", PackageReference=QFN-28, PartNumber=CP2102-GM, Sub-Family="USB Bridges"
J1: library part CMP-1502-03253-2, Color=Black, Contact Resistance=30mΩ, Current Rating=1A, Flammability Rating="UL94 V-0", Insulation Resistance=1GΩ, Max Operating Temperature=105°C, Min Operating Temperature=-40°C, Operating Supply Voltage=30V, Connector Type=USB, Contact Material=Copper, Contact Plating=Gold, Gender=Receptacle, Height=2.9mm, Lead Free="Lead Free", Length=5.9mm, Mount="Horizontal, Surface Mount", NexarPartId=19991173, Number of Contacts=5, Number of Pins=5, Number of Ports=1, Number of Positions=5, Orientation=Horizontal, Packaging="Tape and Reel", Plating=Nickel, REACH SVHC=Unknown, RoHS=Compliant, Termination=Solder, USB Standard="USB 2.0", Voltage Rating=30V
J2: library part CMP-2000-05164-1, "Male Header, Pitch 2 mm, 1 x 3 Position, Height 6 mm, Tail Length 3.4 mm, -25 to 85 degC, RoHS, Bulk", Manufacturer=JST, Datasheet URL=https://datasheet.ciiva.com/11746/0900766b80826550-11746939.pdf, Datasheet Version=Oct-06, Manufacturer URL=http://www.jst.com/home2.html, No of Positions=3, Pitch=2mm, Style/Orientation=StraightHeader/Plug, Termination=Crimp, Type=ShroudedHeader
LED1 LED2: library part CMP-62016-000037-1, "LED RED DIFFUSED 0805 SMD", Case Code (Imperial)=0805, Case Code (Metric)=2012, Color=Red, Forward Current=25mA, Forward Voltage=2.5V, Lens Color=White, Max Operating Temperature=85°C, Min Operating Temperature=-30°C, Package Quantity=16000, Power Dissipation=65W, Reverse Voltage=12V, Test Current=20mA, Case/Package=0805, Depth=1.35mm, Dominant Wavelength=633nm, Height=0.9mm, Illumination Color=Red, Length=2mm, Lens Size=1.25mm, Lens Style=Flat, Lens Transparency=Diffused, Luminous Flux=0.47lm, Luminous Intensity=180mcd, Mount="Surface Mount", Number of Elements=1, Number of LEDs=1, Number of Pins=2, Packaging="Tape and Reel", Radiation Hardening=No, Viewing Angle=160°, Width=1.25mm
Q3: library part CMP-00030-42864886-1, "SI2301BDS-T1-GE3 Trans Mosfet P-ch Si 20V 2.2A 3-PIN SOT-23 T/r / Mosfet P-ch 20V 2.2A SOT23-3", Case/Package=SOT-23-3, Continuous Drain Current (ID)=-2.2A, Drain to Source Breakdown Voltage=-20V, Drain to Source Resistance=100mΩ, Gate to Source Voltage (Vgs)=8V, Input Capacitance=375pF, Max Operating Temperature=150°C, Max Power Dissipation=700mW, Min Operating Temperature=-55°C, Resistance=100MΩ, Threshold Voltage=-950mV, Drain to Source Voltage (Vdss)=-20V, Element Configuration=Single, Fall Time=40ns, Height=1.02mm, Lead Free="Lead Free", Length=3.04mm, Mount="Surface Mount", NexarPartId=42864886, Nominal Vgs=-950mV, Number Of Channels=1, Number of Elements=1, Number of Pins=3, Power Dissipation=700mW, Radiation Hardening=No, Rds On Max=100mΩ, REACH SVHC=Unknown, Rise Time=40ns, RoHS=Compliant, Schedule B="8541210080, 8541210080", Turn-Off Delay Time=30ns, Turn-On Delay Time=20ns, Weight=1.437803g, Width=1.4mm
R1 R2 R3 R4 R5: library part CMP-2001-00347-1, Manufacturer=Panasonic, Part Number=ERJ-6GEYJ123V
R6: library part CMP-1665-00002-5, "Chip Resistor, 0 Ohm, +/- 1%, 0.125 W, -55 to 155 degC, 0805 (2012 Metric), RoHS, Tape and Reel", Case Code (Imperial)=0805, Case Code (Metric)=2012, Max Operating Temperature="155 degC", Min Operating Temperature="-55 degC", Package Quantity=5000, PartNumber=ERJ-6GEY0R00V, Resistance="0 Ohm", Tolerance=5%, Case/Package=0805, ComponentLink1Description="Manufacturer URL", ComponentLink1URL=http://www.panasonic.com/, ComponentLink2Description=Datasheet, ComponentLink2URL=http://industrial.panasonic.com/cdbs/www-data/pdf/RDA0000/AOA0000C84.pdf, DatasheetVersion=03/2015, Height="0.6 mm", Length="2 mm", Mounting Technology="Surface Mount", PackageDescription="2-Pin Surface Mount Device, Body 2 x 1.25 mm", Packaging="Tape and Reel", Radiation Hardening=No, REACH SVHC="No SVHC", RoHSCompliant=True, Width="1.25 mm"
R7: library part CMP-2001-00644-1, Manufacturer=Panasonic, Part Number=ERA6AEB472V
R8: library part CMP-2001-00609-1, Manufacturer=Panasonic, Part Number=ERA6AEB202V
R9: library part CMP-2000-00114-1, Manufacturer=Panasonic, Part Number=ERA-3AEB681V
R10: library part CMP-03412-037792-1, "RES SMD 22.1K OHM 1% 1/10W 0603", Case Code (Imperial)=0603, Case Code (Metric)=1608, Max Operating Temperature=155°C, Min Operating Temperature=-55°C, Package Quantity=5000, Power Rating=100mW, Resistance=22.1kR, Temperature Coefficient=100ppm/°C, Tolerance=1%, Voltage Rating=50V, Case/Package=0603, Height=0.45mm, Lead Free="Lead Free", Length=1.6mm, Packaging="Tape and Reel", Series=RC, Size Code=0603, Termination=SMD/SMT, Voltage Rating (DC)=50V, Width=0.8mm
R11: library part CMP-2000-00527-1, Manufacturer=Panasonic, Part Number=ERJ-3EKF4752V
R14: library part CMP-03211-000699-1, "RES SMD 330Ω 0.1% 1/16W 0603", Manufacturer="TE Connectivity", Manufacturer Part Number=CPF0603B330RE1, Package=CPF0603, Power Rating=0.063W, Resistance=330Ω, Temperature="-55°C to +155°C", Temperature Coefficient=25ppm/°C, Temperature Range High=+155°C, Temperature Range Low=-55°C, Tolerance=0.1%, Voltage Rating=50V, Automotive=No, Category=Res, ComponentLink2Description=Datasheet, ComponentLink2URL=https://www.te.com/commerce/DocumentDelivery/DDEController?Action=showdoc&DocId=Data+Sheet%7F1773200%7FM%7Fpdf%7FEnglish%7FENG_DS_1773200_M.pdf%7F3-1676481-2, Composition="Thin Film", Device Class L1="Passive Components", Device Class L2=Resistors, Device Class L3="Chip SMD Resistors", Height=0.55mm, Ipc Land Pattern Name=RESC15580X45, Lead Free=Yes, Octopart=https://octopart.com/cpf0603b330re1-te+connectivity-9539413, octopart_url=https://octopart.com/cpf0603b330re1-te+connectivity-9539413, Packaging="1k Reel", RoHS=TRUE, Series=CPF
R15: library part CMP-26527-006357-1, "2kΩ ±1% 0.1W 0603 Thick Film Chip Resistor AEC-Q200 compliant", Case Code (Imperial)=0603, Case Code (Metric)=1608, Max Operating Temperature=155°C, Max Power Dissipation=100mW, Min Operating Temperature=-55°C, Resistance=2kR, Resistor Type="Thick Film", Temperature Coefficient=100ppm/°C, Tolerance=1%, Working Voltage=75V, Case/Package=0603, Construction=Rectangular, Contact Plating=Tin, Depth=0.8mm, Features="Automotive AEC-Q200", Height=0.022inch, Lead Free="Lead Free", Length=1.55mm, Military Standard=Not, Mount="Surface Mount", Number of Terminations=2, Packaging="Tape and Reel", Power Rating=100mW, Radiation Hardening=No, RoHS Compliant=Yes, Series=RMCF, Technology="THICK FILM", Width=0.031inch
R16: library part CMP-2001-04377-1, Manufacturer=Panasonic, Part Number=ERJ-6ENF1003V
SW1 SW2: library part CMP-03913-86984039-2, "Tactile Switch, 0.05A, 12Vdc, 250Gf, Smd Rohs Compliant: Yes", Contact Current Rating=50mA, Contact Resistance=100mΩ, Insulation Resistance=100MΩ, Max Operating Temperature=85°C, Min Operating Temperature=-40°C, Voltage Rating=12V, Contact Plating=Silver, Current Rating=50mA, Height=5.1mm, Life (Cycles)=500kcycles, Mount="Surface Mount", Packaging="Tape and Reel", RoHS=Compliant, Voltage Rating (DC)=12V
U1: library part CMP-0471-00454-1, "Standalone Linear Li-Ion Battery Charger with Thermal Regulation, 4.25 to 6.5 V Vin, 5-pin SOT23 (S5-5), -40 to 85 degC, Pb-Free, Mini Tape and Reel", Float Voltage="4.2 V", Manufacturer="Linear Technology", Max Charge Current(A)=0.8, Battery Chemistry="Li-Ion, Li-Polymer", Charge Termination=C/10, Code_JEDEC=MO-193, ComponentLink1Description="Manufacturer URL", ComponentLink1URL=http://www.linear.com/, ComponentLink2Description=Datasheet, ComponentLink2URL=http://cds.linear.com/docs/en/datasheet/405442xf.pdf, ComponentLink3Description="Package Specification", ComponentLink3URL=http://cds.linear.com/docs/en/packaging/SOT_5_05-08-1635.pdf, Mounting Technology="Surface Mount", Number of Cells=1, PackageDescription="5-Pin Plastic TSOT-23, Body 1.63 x 2.90 mm, Pitch 0.95 mm", PackageReference=S5-5, PackageVersion=Jun-10, Packing="Mini Tape and Reel", PartNumber=LTC4054ES5-4.2#TRMPBF, RoHS=TRUE, Type of Charger=Linear, Vin Max(V)=6.5, Vin Min(V)=4.25
U2: library part CMP-06324-000027-1, "IC REG LINEAR 3.3V 500MA SOT23-5", Case/Package=SOT-23-5, Dropout Voltage=350mV, Max Input Voltage=12V, Max Operating Temperature=125°C, Min Input Voltage=2.5V, Min Operating Temperature=-40°C, Nominal Output Voltage=3.3V, Output Current=500mA, Lead Free="Lead Free", Mount="Surface Mount", Number of Pins=5, Number of Regulators=1, Output Type=Fixed, Output Voltage=3.3V, Packaging="Cut Tape", REACH SVHC="No SVHC"

## Free pads (board coordinates)
  round 0 hole 78.74 unplated: 7(390,2685) 8(3355,2680) 9(3360,95) 10(365,80)

## Via types
v1: diameter 40, hole 24, Top Layer to Bottom Layer, 39 vias
v2: diameter 19.68, hole 7.87, Top Layer to Bottom Layer, 9 vias
v3: diameter 50, hole 28, Top Layer to Bottom Layer, 2 vias

## Nets (pads, with @x,y where several pads share a name; then routed paths per layer and width w, separated by ;. In a path a pad name is that pad's centre, name@x,y a point inside that pad or via, vN(x,y) a via of type N, cw(c..) or ccw(c..) an arc to the next point about the centre after c; other vN are vias at no path point)
3V3: C2.2 C4.1 C5.2 C7.1 C8.1 IC1.8 IC2.6 IC2.7 J2.1 R1.2 R2.2 R3.2 R4.2 U2.5 | length 1330.1
  Top Layer w8: C4.1 460,1050 495.94,1085.94 540,1085.94 ; C5.2 553.72,991.28 588.59,991.28 615,964.87 v1(615,960) ; C5.2@540,1018.15 540,1085.94 ; IC2.7 540,1085.94 ; IC2.6 559.69,1105.63 540,1085.94 ; v1(1315,290) 1330,290 1331.61,291.61 R1.2 ; v1(1335,505) 1360,480 R2.2 ; IC1.8@2296.02,625.04 IC1.8@2296.06,625 ; IC1.8 2311.18,630 2395,630 2440,675 C2.2 2339.57,729.57 v1(2335,725) ; R4.2 v1(2860,820) ; C8.1 C8.1@2936.01,1388.99 ; 2972.56,1395 3019.01,1348.55 v1(3019.01,1348.42) ; R3.2 v1(3010,800) ; v3(3340,965) 3343.74,968.74 J2.1
ADC: IC1.2 R7.2 R8.1 | length 720.6
  Top Layer w8: IC1.2 2363.74,158.74 2425,220 2695,220 2752.17,277.17 2752.17,299.58 2760,307.4 R7.2 R8.1
CHARGER: D2.1 U1.3 | length 23.8
  Top Layer w8: U1.3 1675.53,1437.4 U1.3@1684.32,1446.2
EN: IC1.3 R3.1 | length 958
  Top Layer w8: IC1.3 2442.48,237.48 2575,370 2575,520 2600,545 2896.06,545 2978.03,626.97 2986.06,635 R3.1@2990,635 ; R3.1@3000,625 R3.1 ; R3.1@3028.49,615 R3.1@3039.81,615
GND: BT1.1 C1.2 C2.1 C3.1 C4.2 C5.1 C6.1 C7.2 C8.2 C9.2 C10.2 D1.2 IC1.9 IC2.3 IC2.29 J1.5 J2.2 LED1.1 R5.1 R7.1 R11.1 R15.2 R16.2 SW1.A1 SW1.A2 SW2.A1 SW2.A2 U1.2 U2.2 | length 3600.3
  Top Layer w6: v1(530,1290) 530,1205 570.32,1164.68 IC2.3@587.24,1164.68
  Top Layer w8: v1(120,2005) 121.34,2006.34 263.84,2006.34 317.5,2060 275.69,2101.81 121.81,2101.81 v1(120,2100) ; v1(135,700) C3.1 ; J1.5 229.49,1020.51 v1(250,1000) ; LED1.1 398.66,1530 v1(403.66,1525) ; D1.2 330,1180 360,1210 430,1210 v1(455,1235) ; v1(455,880) 460,885 C4.2 C4.2@461.62,965 ; C5.1 540,885 v1(545,880) ; v1(560,240) 556.81,243.19 SW2.A2 SW2.A1 ; IC2.3@585.32,1164.68 IC2.3 ; v2(651.69,1101.69) v2(695,1101.69) ; v2(651.69,1145) IC2.29@651.69,1164.68 ; v2(651.69,1188.31) IC2.29@651.69,1164.68 ; v2(695,1188.31) v2(738.31,1188.31) ; v1(710,865) 710,925 R11.1 ; v2(738.31,1101.69) v2(738.31,1145) v2(695,1145) 675.32,1164.68 IC2.29@651.69,1164.68 ; SW1.A2@931.81,335 SW1.A1@1126.38,335 ; SW1.A2 930,334.45 930,248.66 940,238.66 v1(940,230) ; v1(1225,665) R5.1 ; v1(1315,1340) R15.2 ; C6.1 v1(1455,1595) ; v1(1580,630) 1581.18,631.18 IC1.9 ; U1.2 1670.23,1393.99 1744.31,1393.99 1768.3,1370 v1(1770,1370) ; v1(2175,1255) R16.2 ; v1(2340,810) 2340.43,809.57 2430.87,809.57 C2.1 ; v1(2475,1131.45) C10.2 ; C1.2 v1(2650,120) ; v1(2575,1285) U2.2 ; v1(2595,310) 2672.6,310 R7.1 ; v1(2735,1470) 2755,1450 2807.15,1450 C7.2 ; v1(2795,1095) C9.2 ; C8.2 2999.31,1462.83 3000.36,1463.88 3013.88,1463.88 v1(3020,1470) ; v3(3340,875) 3347.5,882.5 3497.5,882.5 J2.2
I_N: D1.1 IC2.5 J1.2 | length 532.9
  Top Layer w8: J1.2 282.28,1097.28 ; 292.6,1134.72 292.6,1107.6 282.28,1097.28 ; v1(335,1090) 289.57,1090 282.28,1097.28 ; v1(386.21,1048.79) 392.34,1054.91 404.76,1054.91 475.17,1125.31 IC2.5
  Bottom Layer w8: v1(335,1090) 335,1058 344.21,1048.79 v1(386.21,1048.79)
I_P: D1.3 IC2.4 J1.3 | length 662
  Top Layer w8: J1.3 181.84,1068.71 211.29,1068.71 220,1060 355,1060 367.4,1072.4 367.4,1103.56 ; 367.4,1134.72 367.4,1103.56 ; IC2.4@586.8,1145.06 569.56,1145.06 561.25,1153.37 554.62,1153.37 546.31,1145.06 539.69,1145.06 535,1149.75 535,1165.63 523.56,1177.06 516.94,1177.06 510,1170.13 510,1154.69 505.31,1150 494.69,1150 490,1154.69 490,1178.37 485.31,1183.06 478.69,1183.06 470.31,1174.69 470.31,1158.19 465.63,1153.5 459,1153.5 453.63,1158.87 453.63,1171.91 448.94,1176.6 436.6,1176.6 430.71,1170.71 430.71,1110.71 423.56,1103.56 367.4,1103.56
IO0: IC1.12 R1.1 SW1.B1 SW1.B2 | length 852.8
  Top Layer w8: SW1.B2@900,492.48 1126.38,492.48 1212.52,492.48 1336.61,368.39 R1.1 1643.96,368.39 1648.65,373.07 1648.65,377.31 1666.3,394.96 IC1.12
IO2: IC1.11 R2.1 | length 182.2
  Top Layer w8: R2.1 1681.65,480 IC1.11
NetBT1_2: BT1.2 D2.2 Q3.3 | length 19.9
  Top Layer w8: D2.2 D2.2@2066.27,1538.37 ; 2187.5,1465 2191,1465
NetC3_2: C3.2 J1.Shell | length 433.3
  Top Layer w8: J1.Shell@73.54,1229.17 73.54,1118.94 73.54,1024.45 73.54,914.21 75.51,914.21 135,854.72 C3.2 C3.2@130,834.53
NetC9_1: C9.1 U2.4 | length 94.3
  Top Layer w8: U2.4 2782.4,1247.6 2792.05,1237.95 2792.05,1216.57 C9.1
NetC10_1: C10.1 Q3.2 U2.1 U2.3 | length 19.7
  Top Layer w8: U2.1@2625.59,1328.83 2632.02,1322.4 U2.1
NetIC1_4: IC1.4 R6.2 | length 683.4
  Top Layer w8: IC1.4 2371.22,316.22 2440,385 2440,530 2635,725 R6.2@2725,725 ; R6.2@2715,754.45 R6.2
NetIC1_10: IC1.10 R5.2 | length 349.6
  Top Layer w8: R5.2 1388.94,661.06 1418.94,661.06 1527.56,552.44 IC1.10
NetLED1_2: LED1.2 R9.1 | length 265.9
  Top Layer w8: R9.1 164.37,1460.75 164.37,1525.31 169.06,1530 LED1.2@263.85,1530
NetLED2_1: LED2.1 R14.1 | length 124.6
  Top Layer w8: R14.1 LED2.1@1876.34,1285 ; LED2.1@1865,1296.34 LED2.1@1876.34,1285 ; LED2.1 LED2.1@1876.34,1285
NetQ3_1: Q3.1 R16.1 | length 101.5
  Top Layer w8: R16.1 2269,1345.77 2269,1427.5
NetR14_2: R14.2 U1.1 | length 112.3
  Top Layer w8: U1.1 1664.21,1290.47 1674.69,1280 R14.2@1700,1280
NetR15_1: R15.1 U1.5 | length 115.5
  Top Layer w8: R15.1 1533.75,1340 1538.44,1344.69 1538.44,1353.8 1547.23,1362.6 U1.5
RST: C1.1 IC1.1 R4.1 R6.1 SW2.B1 SW2.B2 | length 4343.5
  Top Layer w8: SW2.B2 SW2.B1 775,501.93 775,690 980,895 2932.31,895 2937,890.31 2937,661.68 2932.31,657 2866.23,657 R4.1 ; IC1.1 2320.62,90.62 2360.62,90.62 2395,125 C1.1@2435.79,125 ; C1.1 2450.47,159.27 2476.2,185 2525,185 2557.87,152.13 2582.87,152.13 v1(2585,150) ; R6.1 2645.55,675.55 2635,665 2635,635 2661.55,608.45 v1(2707.38,608.45) 2827.85,608.45 R4.1@2873.28,653.88
  Bottom Layer w8: v1(2585,150) 2506,229 2506,490.8 2590.2,575 2705.38,575 2707.38,577 v1@2707.38,589
RX: IC1.15 IC2.26 | length 3203.1
  Top Layer w8: IC2.26 675.32,1310.32 685,1320 925.31,1320 975,1270.31 975,955.2 606.57,586.77 331.46,586.77 326.77,582.09 326.77,318.23 486.26,158.74 IC1.15
SIG: J2.3 R8.2 | length 903.2
  Top Layer w8: R8.2 3190,315 3215,340 3215,690 3310,785 3478.1,785 3504.36,811.26 J2.3
TX: IC1.16 IC2.25 | length 3192.9
  Top Layer w8: IC2.25@694.94,1253.2 694.94,1300.31 699.62,1305 920,1305 960,1265 960,960 600.77,600.77 325.66,600.77 312.77,587.89 312.77,297.23 480,130 1626.64,130 1676.64,80 IC1.16
VBUS: C6.2 D1.5 J1.1 LED2.2 R9.2 R10.1 U1.4 | length 3667.9
  Top Layer w8: J1.1@201.43,1126.75 220,1145.31 220,1260 260,1300 ; R9.2 R9.2@243.83,1326.17 ; R9.2@244.81,1327.16 R9.2@250.95,1321.02 ; R9.2@250.95,1335 R9.2@250.95,1321.02 ; D1.5 330,1295.31 325.31,1300 260,1300 ; R10.1 850,983.07 v1(850,1050) ; v1(1030,1110) 1030,1275 920,1385 345,1385 260,1300 ; C6.2@1450,1464.13 C6.2@1470.43,1443.7 ; C6.2 1462.17,1437.4 U1.4 ; R9.2@250.95,1321.02 252.65,1319.31 252.65,1307.35 260,1300
  Top Layer w12: R9.2@245,1335 250.95,1335 265,1335 375,1445 1129.27,1445 1155,1419.27 1155,1240 1255,1140 1820,1140
  Bottom Layer w8: v1(850,1050) 895,1095 1009.31,1095 1024.31,1110 v1(1030,1110)
VBUS_DEV: IC2.8 R10.2 R11.2 | length 180.7
  Top Layer w8: IC2.8 635.94,1034.05 647.2,1022.8 671.42,1022.8 702.27,991.94 702.27,988.99 712.05,979.21 R11.2 719.21,975 R10.2
pads on no net: BT1. D1.4 D1.6 IC1.5 IC1.6 IC1.7 IC1.13 IC1.14 IC1.17 IC2.1 IC2.2 IC2.9 IC2.10 IC2.11 IC2.12 IC2.13 IC2.14 IC2.15 IC2.16 IC2.17 IC2.18 IC2.19 IC2.20 IC2.21 IC2.22 IC2.23 IC2.24 IC2.27 IC2.28 J1.4 J1.MH1 J1.MH2

## Polygon pours and split planes (outlines as drawn)
GND on Top Layer "GND_L01_P031" (solid, remove dead copper, pour order 31): 185 vertices, not listed, extent 6.61,-0.95 3743.39,2790.95
NetBT1_2 on Top Layer "NETBT1_2_L01_P007" (solid, pour order 7): 3260,2065 3645,2065 3645,1635 3210,1635 3210,2065
CHARGER on Top Layer "CHARGER_L01_P009" (solid, pour order 9): 1965,1635 1965,1415 1620,1415 1620,1635
NetC10_1 on Top Layer "NETC10_1_L01_P011" (solid, pour order 11): 2230,1520 2690,1520 2690,1205 2230,1205
VBUS on Top Layer "VBUS_L01_P013" (solid, pour order 13): 1600,1555 1600,1390 1435,1390 1075,1390 1075,1555
VBUS on Top Layer "VBUS_L01_P015" (solid, pour order 15): 1782.48,1210 2035,1210 2035,1020 1782.48,1020
NetBT1_2 on Top Layer "NETBT1_2_L01_P016" (solid, pour order 16): 2005,1384.15 2005,1635 3645,1635 3645,1525 2220,1515 2220,1384.15
3V3 on Top Layer "3V3_L01_P002" (solid, pour order 2): 2705.48,1261.56 2705.48,1420 3090,1420 3090,1258.13
GND on Bottom Layer "GND_L04_P030" (solid, remove dead copper, pour order 30): 185 vertices, not listed, extent 6.61,-0.95 3743.39,2790.95
3V3 on 3V3 (split plane): 705 vertices, not listed, extent 26.7,19.14 3723.3,2770.86
GND on GND (split plane): 705 vertices, not listed, extent 26.7,19.14 3723.3,2770.86

## Keep-outs
Keep-Out Layer:
  region: 1665,-285 2360,-285 2360,40 2355,45 1665,45

## Other copper
Multi-Layer:
  pour cut-out: 1640,-287.3 2360,-282.7 2360,42.93 1640,42.93

## Silkscreen, mask and mechanical layers (free items; w line width, h text height)
Top Overlay:
  text "VCC" at 3585,995 h40
  text "GND" at 3590,870 h40
  text "SIG" at 3590,775 h40

## Text inside footprints (layer, text, board x,y; h text height)
J1: Mechanical 2 "PCB Edge" at -9.13,1118.94 h16 r270